# EAGLE board Dashboard Order r1 (EAGLE 7.1.0)
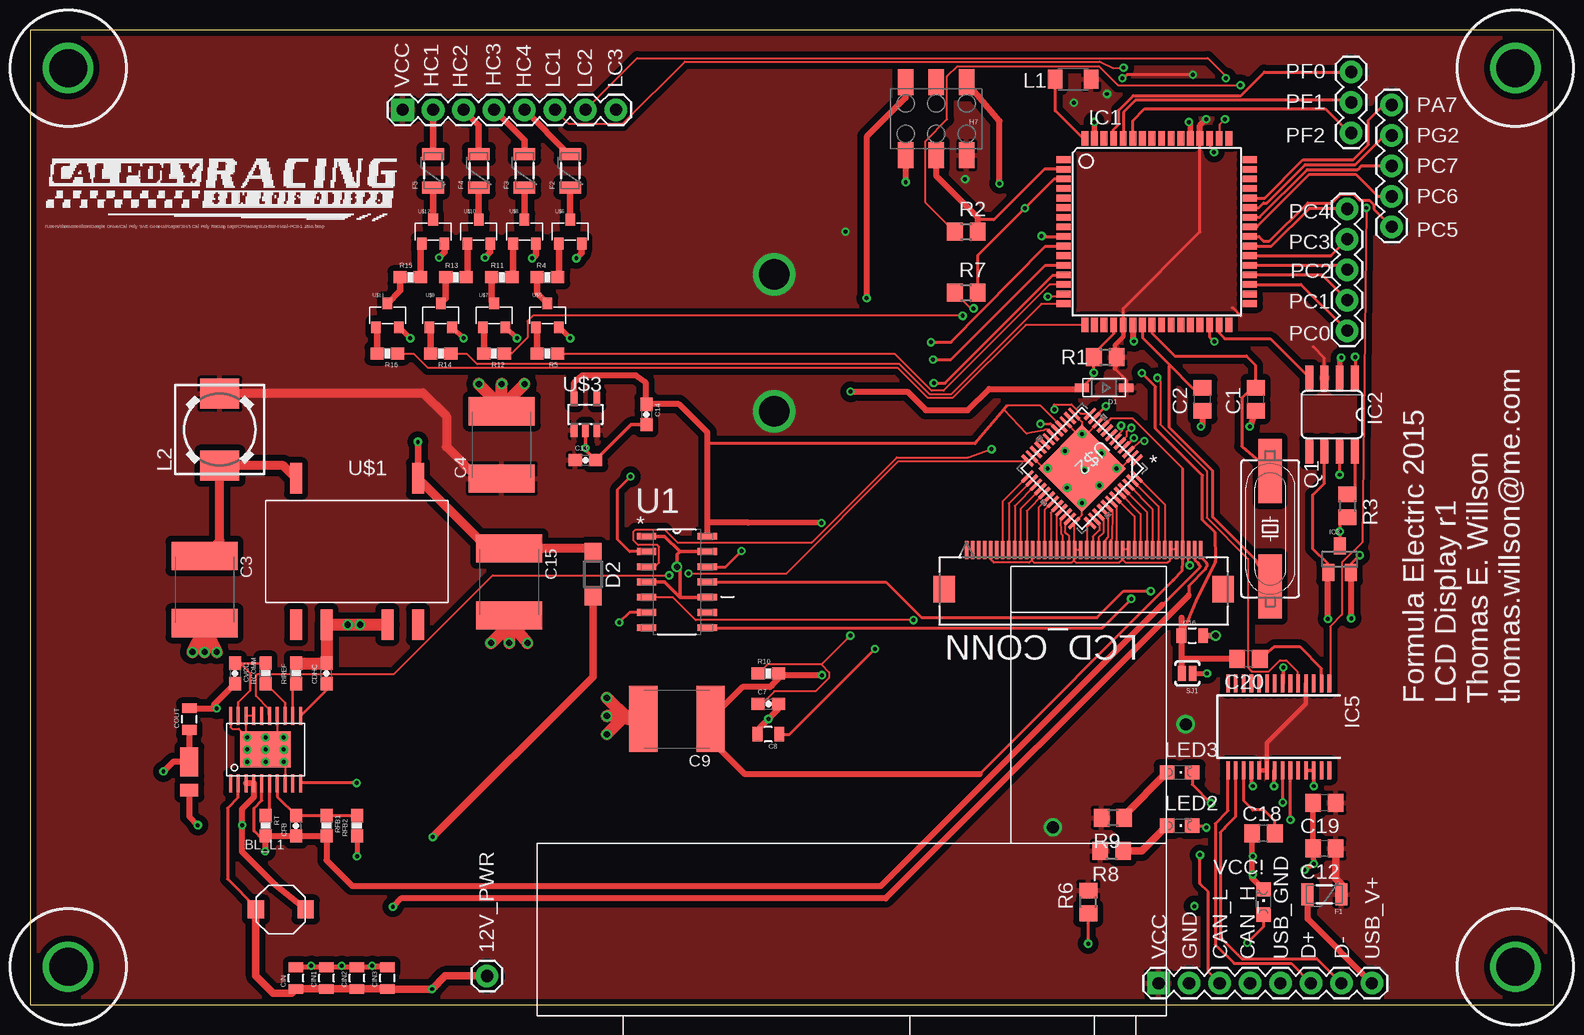
[diagram p0: board, top side]
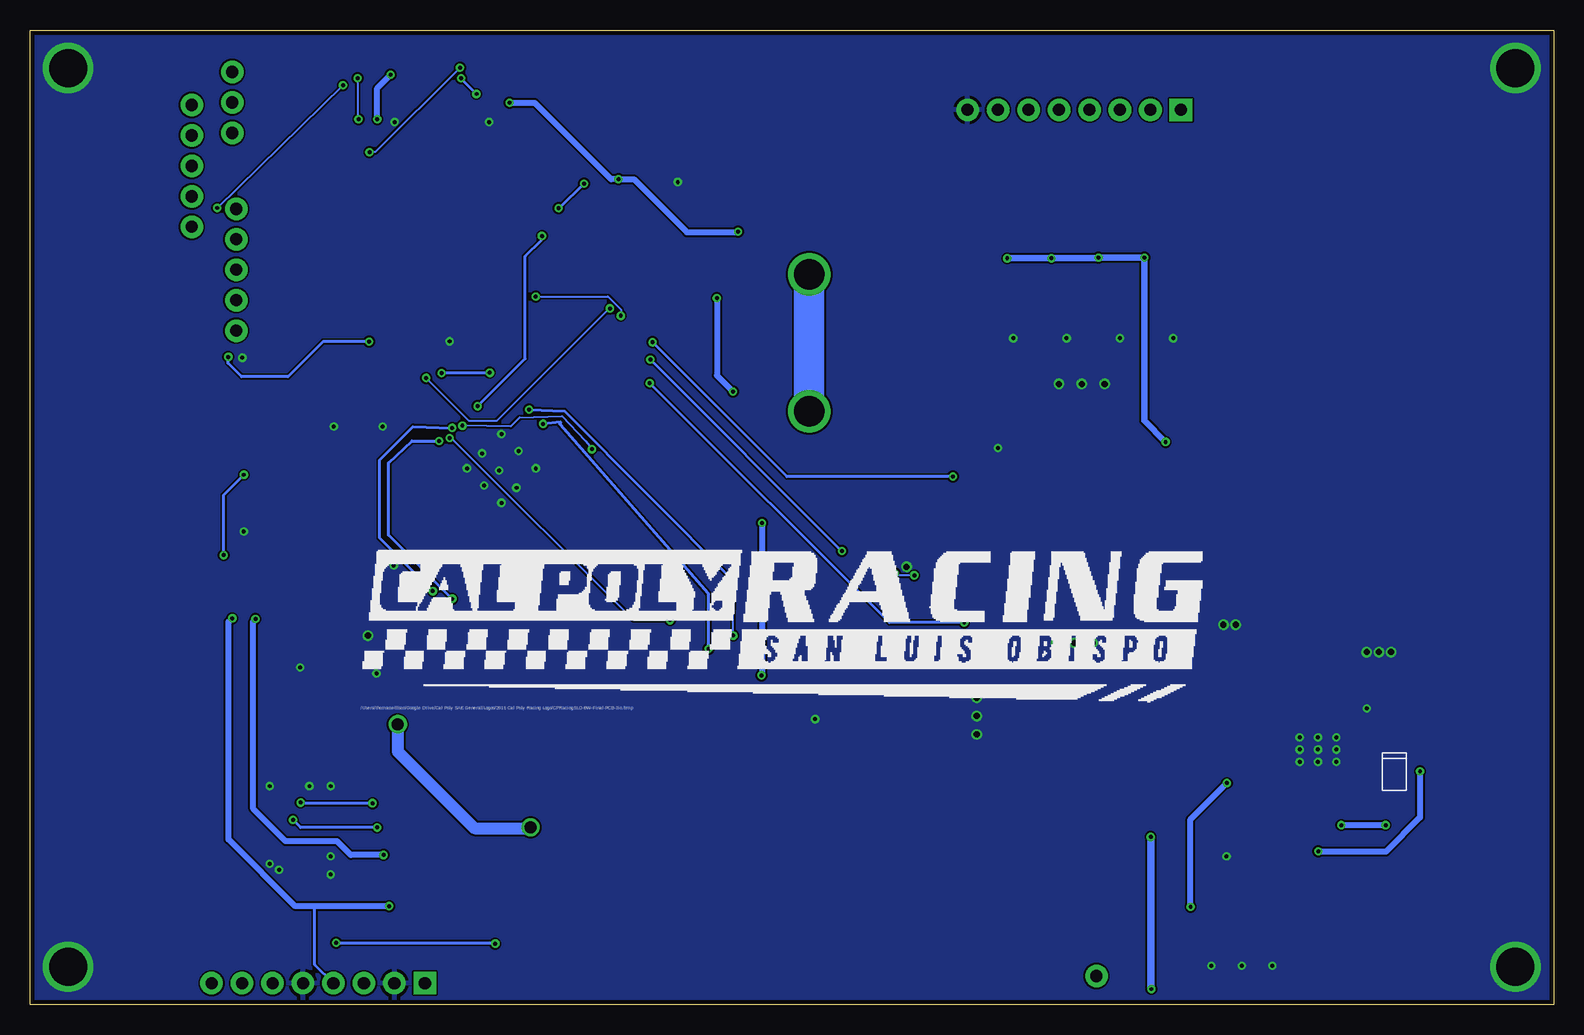
[diagram p1: board, bottom side, seen from below]

Size 127 x 81.28 mm. Coordinates in mm from the lower left corner, seen from the top.
Outline: 0,0 127,0 127,81.28 0,81.28 0,0
Copper layers (1*16): Top 0.0356mm / dielectric 1.5011mm / Bottom 0.0356mm
Design rules "LaenPCBOrder *": minimum track width 6mil, minimum drill 13mil, track to track 6mil, track to pad 6mil, pad to pad 6mil, via to via 6mil, smd to smd 6mil, copper to edge 15mil, drill to drill 6mil, minimum pad ring 7mil, minimum via ring 7mil, stop-mask expansion 3mil, vias tented up to drill 13mil, thermal gap 10mil

## Footprints (pad centres in the part's own frame; a part is rotated, then mirrored left to right if it is on the bottom)
1X01 = drill 1.016 pad 1.88: 1 0,0
POWERDI-123 = smd 1.05 x 1.5: A -0.85,0 | smd 2.4 x 1.5: C 1.525,0
2-SMD = smd 1.35 x 1.5: 1 -2.075,0; 2 2.075,0
C0805 = smd 1.3 x 1.5: 1 -0.95,0; 2 0.95,0
C2220 = smd 2.35 x 5.5: 1 -2.8,0; 2 2.8,0
0603-CAP = smd 1.1 x 1: 1 -0.85,0; 2 0.85,0
0805 = smd 0.8 x 1.2: 1 -0.9,0; 2 0.9,0
1X08 = drill 1.016 pad 1.88 square: 1 0,0 | drill 1.016 pad 1.88: 2 2.54,0; 3 5.08,0; 4 7.62,0; 5 10.16,0; 6 12.7,0; 7 15.24,0; 8 17.78,0
SOD-123 = smd 1.2 x 0.7: A 1.85,0; C -1.85,0
SOD123 = smd 1.4 x 1.4: A 1.9,0; C -1.9,0
1X05 = drill 1.016 pad 1.88: 1 0,0; 2 2.54,0; 3 5.08,0; 4 7.62,0; 5 10.16,0
1X03 = drill 1.016 pad 1.88: 1 0,0; 2 2.54,0; 3 5.08,0
PTC-1206 = smd 1 x 1.8: 1 -1.4,0; 2 1.4,0
2X3_SMD_FCI_54202-G30 = smd 1.27 x 2.18: 1 -2.54,-3.05; 2 -2.54,3.05; 3 0,-3.05; 4 0,3.05; 5 2.54,-3.05; 6 2.54,3.05
TQFP64 = smd 1.194 x 0.559: 1 -7.76,6; 2 -7.76,5.2; 3 -7.76,4.4; 4 -7.76,3.6; 5 -7.76,2.8; 6 -7.76,2; 7 -7.76,1.2; 8 -7.76,0.4; 9 -7.76,-0.4; 10 -7.76,-1.2; 11 -7.76,-2; 12 -7.76,-2.8; 13 -7.76,-3.6; 14 -7.76,-4.4; 15 -7.76,-5.2; 16 -7.76,-6; 33 7.76,-6; 34 7.76,-5.2; 35 7.76,-4.4; 36 7.76,-3.6; 37 7.76,-2.8; 38 7.76,-2; 39 7.76,-1.2; 40 7.76,-0.4; 41 7.76,0.4; 42 7.76,1.2; 43 7.76,2; 44 7.76,2.8; 45 7.76,3.6; 46 7.76,4.4; 47 7.76,5.2; 48 7.76,6 | smd 0.559 x 1.194: 17 -6,-7.76; 18 -5.2,-7.76; 19 -4.4,-7.76; 20 -3.6,-7.76; 21 -2.8,-7.76; 22 -2,-7.76; 23 -1.2,-7.76; 24 -0.4,-7.76; 25 0.4,-7.76; 26 1.2,-7.76; 27 2,-7.76; 28 2.8,-7.76; 29 3.6,-7.76; 30 4.4,-7.76; 31 5.2,-7.76; 32 6,-7.76; 49 6,7.76; 50 5.2,7.76; 51 4.4,7.76; 52 3.6,7.76; 53 2.8,7.76; 54 2,7.76; 55 1.2,7.76; 56 0.4,7.76; 57 -0.4,7.76; 58 -1.2,7.76; 59 -2,7.76; 60 -2.8,7.76; 61 -3.6,7.76; 62 -4.4,7.76; 63 -5.2,7.76; 64 -6,7.76
SO08 = smd 0.66 x 2.032: 1 -1.905,-3.073; 2 -0.635,-3.073; 3 0.635,-3.073; 4 1.905,-3.073; 5 1.905,3.073; 6 0.635,3.073; 7 -0.635,3.073; 8 -1.905,3.073
SOT-23 = smd 1 x 1.4: 1 -0.95,-1.1; 2 0.95,-1.1; 3 0,1.1
SSOP28 = smd 0.381 x 1.499: 1 -4.225,-3.625; 2 -3.575,-3.625; 3 -2.925,-3.625; 4 -2.275,-3.625; 5 -1.625,-3.625; 6 -0.975,-3.625; 7 -0.325,-3.625; 8 0.325,-3.625; 9 0.975,-3.625; 10 1.625,-3.625; 11 2.275,-3.625; 12 2.925,-3.625; 13 3.575,-3.625; 14 4.225,-3.625; 15 4.225,3.625; 16 3.575,3.625; 17 2.925,3.625; 18 2.275,3.625; 19 1.625,3.625; 20 0.975,3.625; 21 0.325,3.625; 22 -0.325,3.625; 23 -0.975,3.625; 24 -1.625,3.625; 25 -2.275,3.625; 26 -2.925,3.625; 27 -3.575,3.625; 28 -4.225,3.625
L3216C = smd 1.2 x 1.6: 1 -1.5,0; 2 1.5,0
DR73 = smd 2.5 x 3.25: 1 -3,0; 2 3,0
HIROSE_FH12A-40S-0.5SH(55) = smd 1.803 x 2.21: 41 -11.633,6.68; 42 11.633,6.68 | smd 0.305 x 1.499: P1 -9.754,3.429; P2 -9.246,3.429; P3 -8.738,3.429; P4 -8.255,3.429; P5 -7.747,3.429; P6 -7.239,3.429; P7 -6.756,3.429; P8 -6.248,3.429; P9 -5.74,3.429; P10 -5.258,3.429; P11 -4.75,3.429; P12 -4.242,3.429; P13 -3.759,3.429; P14 -3.251,3.429; P15 -2.743,3.429; P16 -2.261,3.429; P17 -1.753,3.429; P18 -1.245,3.429; P19 -0.762,3.429; P20 -0.254,3.429; P21 0.254,3.429; P22 0.762,3.429; P23 1.245,3.429; P24 1.753,3.429; P25 2.261,3.429; P26 2.743,3.429; P27 3.251,3.429; P28 3.759,3.429; P29 4.242,3.429; P30 4.75,3.429; P31 5.258,3.429; P32 5.74,3.429; P33 6.248,3.429; P34 6.756,3.429; P35 7.239,3.429; P36 7.747,3.429; P37 8.255,3.429; P38 8.738,3.429; P39 9.246,3.429; P40 9.754,3.429
CHIPLED_0805 = smd 1.2 x 1.2: A 0,-1.05; C 0,1.05
HC49UP = smd 5.334 x 1.93: 1 -4.826,0; 2 4.826,0
R0805 = smd 1.3 x 1.5: 1 -0.95,0; 2 0.95,0
0603-RES = smd 1.1 x 1: 1 -0.85,0; 2 0.85,0
SJ_2S-NO = smd 0.635 x 1.27: 1 -0.45,0; 2 0.45,0
SOIC127P600X175-14N = smd 1.6 x 0.559: 1 -2.54,3.81; 2 -2.54,2.54; 3 -2.54,1.27; 4 -2.54,0; 5 -2.54,-1.27; 6 -2.54,-2.54; 7 -2.54,-3.81; 8 2.54,-3.81; 9 2.54,-2.54; 10 2.54,-1.27; 11 2.54,0; 12 2.54,1.27; 13 2.54,2.54; 14 2.54,3.81
V78XX-1000 = smd 1 x 2.54: 1 -5.08,-6.096; 5 5.08,-6.096; 6 5.08,6.096; 7 2.54,6.096; 9 -2.54,6.096; 10 -5.08,6.096
RGZ48_5P15X5P15 = smd 1.245 x 0.279: 1 -3.683,2.743; 2 -3.683,2.261; 3 -3.683,1.753; 4 -3.683,1.245; 5 -3.683,0.762; 6 -3.683,0.254; 7 -3.683,-0.254; 8 -3.683,-0.762; 9 -3.683,-1.245; 10 -3.683,-1.753; 11 -3.683,-2.261; 12 -3.683,-2.743; 25 3.683,-2.743; 26 3.683,-2.261; 27 3.683,-1.753; 28 3.683,-1.245; 29 3.683,-0.762; 30 3.683,-0.254; 31 3.683,0.254; 32 3.683,0.762; 33 3.683,1.245; 34 3.683,1.753; 35 3.683,2.261; 36 3.683,2.743 | smd 0.279 x 1.245: 13 -2.743,-3.683; 14 -2.261,-3.683; 15 -1.753,-3.683; 16 -1.245,-3.683; 17 -0.762,-3.683; 18 -0.254,-3.683; 19 0.254,-3.683; 20 0.762,-3.683; 21 1.245,-3.683; 22 1.753,-3.683; 23 2.261,-3.683; 24 2.743,-3.683; 37 2.743,3.683; 38 2.261,3.683; 39 1.753,3.683; 40 1.245,3.683; 41 0.762,3.683; 42 0.254,3.683; 43 -0.254,3.683; 44 -0.762,3.683; 45 -1.245,3.683; 46 -1.753,3.683; 47 -2.261,3.683; 48 -2.743,3.683 | smd 5.156 x 5.156: EP 0,0 | drill 0.33: V_1 -2.032,2.032; V_2 0,2.032; V_3 2.032,2.032; V_4 -2.032,0.254; V_5 0,0.254; V_6 2.032,0.254; V_7 -2.032,-2.032; V_8 0,-2.032; V_9 2.032,-2.032
SOT23-DBV = smd 0.55 x 1.2: 1 -0.95,-1.3; 2 0,-1.3; 3 0.95,-1.3; 4 0.95,1.3; 5 -0.95,1.3
PWP0020A = smd 0.25 x 1.5: 1 -2.925,-2.8; 2 -2.275,-2.8; 3 -1.625,-2.8; 4 -0.975,-2.8; 5 -0.325,-2.8; 6 0.325,-2.8; 7 0.975,-2.8; 8 1.625,-2.8; 9 2.275,-2.8; 10 2.925,-2.8; 11 2.925,2.8; 12 2.275,2.8; 13 1.625,2.8; 14 0.975,2.8; 15 0.325,2.8; 16 -0.325,2.8; 17 -0.975,2.8; 18 -1.625,2.8; 19 -2.275,2.8; 20 -2.925,2.8 | smd 4.2 x 3: EP 0,0 | drill 0.33: P$1 -1.524,1.016; P$2 0,1.016; P$3 1.524,1.016; P$4 -1.524,0; P$5 0,0; P$6 1.524,0; P$7 1.524,-1.016; P$8 0,-1.016; P$9 -1.524,-1.016
SOT-23-3 = smd 0.8 x 0.976: P$1 0,1; P$2 -0.95,-1; P$3 0.95,-1

## Placement (x,y rotation side)
12V_PWR  M01PTH  [1X01]  38.1,2.41 0 top
BL_D1  DFLS1100-7  [POWERDI-123]  13.28,18.75 90 top
BL_L1  47uH  [2-SMD]  20.9,7.95 0 top
C1  18pF  [C0805]  102.18,50.5 90 top
C2  18pF  [C0805]  97.74,50.5 90 top
C3  22uF  [C2220]  14.55,34.62 270 top
C4  22uF  [C2220]  39.32,46.69 90 top
C7  100nF  [0603-CAP]  61.54,25.1 0 top
C8  4.7uF  [0805]  61.54,22.56 180 top
C9  10uF  [C2220]  53.92,23.83 180 top
C12  100n  [C0805]  107.9,13.03 180 top
C13  1uF  [0603-CAP]  46.3,45.42 0 top
C14  1uF  [0603-CAP]  51.38,49.23 270 top
C15  10uF  [C2220]  39.95,35.26 270 top
C16  4.7nF  [0805]  96.88,30.78 0 top
C18  100n  [C0805]  102.82,14.3 180 top
C19  100n  [C0805]  107.9,16.84 180 top
C20  100n  [C0805]  101.57,28.85 180 top
CAN_UC_CONN  [1X08]  94.08,1.8 0 top
CDHC  390nF  [0603-CAP]  24.71,27.64 90 top
CFB  10.0pF  [0603-CAP]  22.17,14.94 90 top
CIN  4.7uF  [0805]  22.17,2.24 90 top
CIN1  4.7uF  [0805]  24.71,2.24 90 top
CIN2  4.7uF  [0805]  27.25,2.24 90 top
CIN3  4.7uF  [0805]  29.79,2.24 90 top
COUT  120nF  [0805]  13.28,23.83 90 top
CVCC  1uF  [0603-CAP]  17.09,27.64 270 top
D1  1N4148  [SOD-123]  89.53,51.46 180 top
D2  1N5819  [SOD123]  46.94,35.89 270 top
DRIVER_INPUTS_1  [1X05]  109.8,56.21 90 top
DRIVER_INPUTS_2  [1X03]  110.13,77.77 270 top
DRIVER_INPUTS_3  [1X05]  113.51,75.03 270 top
DRIVER_OUTPUTS  [1X08]  31.06,74.63 0 top
F1  16V,0.25A  [PTC-1206]  107.9,9.22 180 top
F2  15V,0.5A  [PTC-1206]  45.03,69.55 90 top
F3  15V,0.5A  [PTC-1206]  41.22,69.55 90 top
F4  15V,0.5A  [PTC-1206]  37.41,69.55 90 top
F5  15V,0.5A  [PTC-1206]  33.6,69.55 90 top
H7  ICSP  [2X3_SMD_FCI_54202-G30]  75.54,73.89 180 top
IC1  AT90CAN128  [TQFP64]  93.93,64.47 0 top
IC2  MCP2551SO8  [SO08]  108.53,49.23 180 top
IC3  NUP2105L  [SOT-23]  109.17,37.16 0 top
IC5  FT232RL  [SSOP28]  104.09,23.19 180 top
L1  CS321613-100K  [L3216C]  86.94,77.17 180 top
L2  22uH  [DR73]  15.82,47.96 90 top
LCD_CONN  FH12A-40S-0.5SH(55)  [HIROSE_FH12A-40S-0.5SH(55)]  87.83,41.35 180 top
LED2  RX  [CHIPLED_0805]  95.83,14.94 270 top
LED3  TX  [CHIPLED_0805]  95.83,19.38 270 top
Q1  56P2859  [HC49UP]  103.38,39.7 270 top
R1  100K  [R0805]  89.64,54 0 top
R2  1k  [R0805]  78.05,64.47 0 top
R3  100K  [R0805]  109.8,41.61 270 top
R4  [0603-RES]  43.13,60.66 0 top
R5  [0603-RES]  43.13,54.31 180 top
R6  1K  [R0805]  88.21,8.59 90 top
R7  1k  [R0805]  78.05,59.39 0 top
R8  1k  [R0805]  90.17,12.83 180 top
R9  1k  [R0805]  90.27,15.6 180 top
R10  47k  [0603-RES]  61.54,27.64 0 top
R11  [0603-RES]  39.32,60.66 0 top
R12  [0603-RES]  38.68,54.31 180 top
R13  [0603-RES]  35.51,60.66 0 top
R14  [0603-RES]  34.24,54.31 180 top
R15  [0603-RES]  31.7,60.66 0 top
R16  [0603-RES]  29.79,54.31 180 top
RCOMM  52.3k  [0603-RES]  19.63,27.64 90 top
RFB1  309k  [0603-RES]  24.71,14.94 270 top
RFB2  16.2k  [0603-RES]  27.25,14.94 90 top
RIREF  20.5k  [0603-RES]  22.17,27.64 90 top
RT  226k  [0603-RES]  19.63,14.94 270 top
SJ1  SOLDERJUMPERNO  [SJ_2S-NO]  96.47,27.64 180 top
U1  74LCX125M  [SOIC127P600X175-14N]  53.92,35.26 0 top
U$1  V7805-1000  [V78XX-1000]  27.25,37.8 180 top
U$2  FT801  [RGZ48_5P15X5P15]  87.71,44.73 225 top
U$3  LP5907-3.3  [SOT23-DBV]  46.3,49.23 0 top
U$4  LM3492HC  [PWP0020A]  19.63,21.29 0 top
U$5  MMBT4401-7-F  [SOT-23-3]  43.13,57.48 0 top
U$6  MMBT4403-7-F  [SOT-23-3]  45.03,64.47 0 top
U$7  MMBT4401-7-F  [SOT-23-3]  38.68,57.48 0 top
U$8  MMBT4403-7-F  [SOT-23-3]  41.22,64.47 0 top
U$9  MMBT4401-7-F  [SOT-23-3]  34.24,57.48 0 top
U$10  MMBT4403-7-F  [SOT-23-3]  37.41,64.47 0 top
U$11  MMBT4401-7-F  [SOT-23-3]  29.79,57.48 0 top
U$12  MMBT4403-7-F  [SOT-23-3]  33.6,64.47 0 top
U$13  TCG043WQLBAANN-GN00  [TCG043WQLBAANN]  71.32,6.3 0 top
VCC!  PWR  [CHIPLED_0805]  102.82,8.59 0 top

## Library data of the parts
12V_PWR CAN_UC_CONN DRIVER_INPUTS_1-DRIVER_INPUTS_3 DRIVER_OUTPUTS H7 = SparkFun-Connectors
BL_D1 = diodes-inc
BL_L1 = tdk
C1 C2 C12 C18-C20 L1 R1-R3 R6-R9 = rcl
C3 C4 C9 C15 = resistor
C7 C8 C13 C14 C16 CDHC CIN CIN1-CIN3 CVCC = SparkFun-Capacitors
CFB COUT RFB1 RFB2 RIREF RT SJ1 = SparkFun-Passives
D1 = adafruit
D2 = diode
F1-F5 = SparkFun
IC1 = at90can128
IC2 = can
IC3 = Artificial Science
IC5 = SmartPrj
L2 = inductors
LCD_CONN = hirose; MPN: FH12A-40S-0.5SH(55); OC_FARNELL: 1324569; OC_NEWARK: 34M6194; PACKAGE: SOCKET FFC/FPC, ZIF, 0.5MM, 40WAY; SUPPLIER: Hirose
LED2 LED3 VCC! = led
Q1 = SparkFun-FreqCtrl
R4 R5 R10-R16 RCOMM = SparkFun-Resistors
U1 = Fairchild_By_element14_Batch_1; MPN: 74LCX125M; OC_FARNELL: 1013776; OC_NEWARK: 78K6286; PACKAGE: SOIC-14; SUPPLIER: Fairchild
U$1 U$5-U$12 = formula electric
U$2 = ftdichip
U$3 U$4 = texas
U$13 = kyocera

## Nets
3.3V: C9.1 C14.1 LCD_CONN.P4 R10.2 U1.14 U$2.9 U$2.16 U$2.18 U$3.5
12V: 12V_PWR.1 BL_L1.1 CIN1.1 CIN2.1 CIN3.1 CIN.1 D2.A U$4.2
12V_PROTECTED: C15.1 D2.C U$1.1 U$6.P$3 U$8.P$3 U$10.P$3 U$12.P$3
AREF: IC1.62
AVR_CS: IC1.10 U1.2
AVR_MISO: IC1.13 U1.6
AVR_MOSI: IC1.12 U1.12
AVR_SCK: IC1.11
AVR_SCLK: U1.9
B2: LCD_CONN.P23 U$2.35
B3: LCD_CONN.P24 U$2.34
B4: LCD_CONN.P25 U$2.33
B5: LCD_CONN.P26 U$2.32
B6: LCD_CONN.P27 U$2.31
B7: LCD_CONN.P28 U$2.30
BACKLIGHT_CTRL: U$2.24 U$4.15
BL_ANODE: BL_D1.C CFB.1 COUT.1 LCD_CONN.P2 RFB1.2 RT.2 U$4.5
BL_CATHODE: LCD_CONN.P1 U$4.10
CAN_H: CAN_UC_CONN.4 IC2.7 IC3.2
CAN_L: CAN_UC_CONN.3 IC2.6 IC3.1
D+: CAN_UC_CONN.6 IC5.15
D-: CAN_UC_CONN.7 IC5.16
DATA_EN: LCD_CONN.P34 U$2.25
DCLK: LCD_CONN.P30 U$2.29
DISP_EN: LCD_CONN.P31 U$2.28
DRV1: DRIVER_OUTPUTS.2 F5.2
DRV2: DRIVER_OUTPUTS.3 F4.2
DRV3: DRIVER_OUTPUTS.4 F3.2
DRV4: DRIVER_OUTPUTS.5 F2.2
DTR: C20.1 IC5.2
FT801_CS_N: U1.3 U$2.6
FT801_MISO: U1.5 U$2.4
FT801_MOSI: U1.11 U$2.5
FT801_SCLK: U1.8 U$2.3
G2: LCD_CONN.P15 U$2.42
G3: LCD_CONN.P16 U$2.41
G4: LCD_CONN.P17 U$2.40
G5: LCD_CONN.P18 U$2.39
G6: LCD_CONN.P19 U$2.38
G7: LCD_CONN.P20 U$2.37
GND: C1.1 C2.1 C3.2 C4.2 C7.2 C8.2 C9.2 C12.2 C13.2 C14.2 C15.2 C16.2 C18.2 C19.2 CAN_UC_CONN.2 CAN_UC_CONN.5 CDHC.2 CIN1.2 CIN2.2 CIN3.2 CIN.2 COUT.2 CVCC.2 DRIVER_OUTPUTS.8 H7.6 IC1.22 IC1.53 IC1.63 IC2.2 IC3.3 IC5.7 IC5.18 IC5.21 IC5.25 IC5.26 LCD_CONN.P3 LCD_CONN.P5 LCD_CONN.P6 LCD_CONN.P13 LCD_CONN.P14 LCD_CONN.P21 LCD_CONN.P22 LCD_CONN.P29 LCD_CONN.P36 R3.2 RFB2.1 RIREF.2 SJ1.1 U1.1 U1.4 U1.10 U1.13 U$1.7 U$1.9 U$2.2 U$2.10 U$2.13 U$2.15 U$2.23 U$2.36 U$2.EP U$2.V_1 U$2.V_2 U$2.V_3 U$2.V_4 U$2.V_5 U$2.V_6 U$2.V_7 U$2.V_8 U$2.V_9 U$3.2 U$4.8 U$4.14 U$4.17 U$4.18 U$4.20 U$4.EP U$4.P$1 U$4.P$2 U$4.P$3 U$4.P$4 U$4.P$5 U$4.P$6 U$4.P$7 U$4.P$8 U$4.P$9 U$5.P$3 U$7.P$3 U$9.P$3 U$11.P$3 VCC!.C
HSYNC: LCD_CONN.P32 U$2.27
INT_N: IC1.9 U$2.11
M8RXD: IC5.1 R2.1
M8TXD: IC5.5 R7.1
N$1 [gnd]: U1.7
N$2: C8.1 U$2.17
N$3: C7.1 R10.1 U$2.12
N$4: CVCC.1 RCOMM.2 U$4.19
N$5: RCOMM.1 U$4.13
N$6: IC2.8 R3.1
N$7: CDHC.1 U$4.11
N$8: BL_D1.A BL_L1.2 U$4.3 U$4.4
N$9: R6.1 VCC!.A
N$10: CFB.2 RFB1.1 RFB2.2 U$4.7
N$11: C1.2 IC1.24 Q1.1
N$12: RT.1 U$4.6
N$13: C3.1 L2.1 U$1.5
N$14: RIREF.1 U$4.12
N$22: IC1.64 L1.2
N$23: R5.2 U$5.P$2
N$24: R4.2 U$6.P$2
N$25: R4.1 U$5.P$1
N$26: F2.1 U$6.P$1
N$27: R12.2 U$7.P$2
N$28: R11.2 U$8.P$2
N$29: R11.1 U$7.P$1
N$30: F3.1 U$8.P$1
N$31: R14.2 U$9.P$2
N$32: IC5.23 LED2.C
N$33: R13.2 U$10.P$2
N$34: IC5.22 LED3.C
N$35: LED2.A R8.1
N$36: LED3.A R9.1
N$37: R13.1 U$9.P$1
N$38: F4.1 U$10.P$1
N$39: R16.2 U$11.P$2
N$40: R15.2 U$12.P$2
N$41: R15.1 U$11.P$1
N$42: F5.1 U$12.P$1
PA0: DRIVER_OUTPUTS.6 IC1.51
PA1: DRIVER_OUTPUTS.7 IC1.50
PA2: IC1.49
PA3: IC1.48
PA4: IC1.47
PA5: IC1.46
PA6: IC1.45
PA7: DRIVER_INPUTS_3.1 IC1.44
PB4(PWM): IC1.14 R5.1
PB5(PWM): IC1.15 R12.1
PB6(PWM): IC1.16 R14.1
PB7(PWM): IC1.17 R16.1
PC0: DRIVER_INPUTS_1.1 IC1.35
PC1: DRIVER_INPUTS_1.2 IC1.36
PC2: DRIVER_INPUTS_1.3 IC1.37
PC3: DRIVER_INPUTS_1.4 IC1.38
PC4: DRIVER_INPUTS_1.5 IC1.39
PC5: DRIVER_INPUTS_3.5 IC1.40
PC6: DRIVER_INPUTS_3.4 IC1.41
PC7: DRIVER_INPUTS_3.3 IC1.42
PD4: IC1.29
PD7: IC1.32
PE2: IC1.4
PE3(PWM): IC1.5
PE4(PWM): IC1.6
PE5(PWM): IC1.7
PE6: IC1.8
PF0: DRIVER_INPUTS_2.1 IC1.61
PF1: DRIVER_INPUTS_2.2 IC1.60
PF2: DRIVER_INPUTS_2.3 IC1.59
PF3: IC1.58
PG0: IC1.33
PG1: IC1.34
PG2: DRIVER_INPUTS_3.2 IC1.43
R2: LCD_CONN.P7 U$2.48
R3: LCD_CONN.P8 U$2.47
R4: LCD_CONN.P9 U$2.46
R5: LCD_CONN.P10 U$2.45
R6: LCD_CONN.P11 U$2.44
R7: LCD_CONN.P12 U$2.43
RESET: C16.1 C20.2 D1.A H7.5 IC1.20 R1.1 SJ1.2
RX: H7.4 IC1.2 R2.2
RX1: IC1.27
RXCAN: IC1.31 IC2.4
SCK: H7.3
SCL: IC1.25
SDA: IC1.26
TCK: IC1.57
TDI: IC1.54
TDO: IC1.55
TMS: IC1.56
TX: H7.1 IC1.3 R7.2
TX1: IC1.28
TXCAN: IC1.30 IC2.1
USB_V_IN [usbvcc]: CAN_UC_CONN.8 F1.2
VCC: C4.1 C12.1 C13.1 C19.1 CAN_UC_CONN.1 D1.C DRIVER_OUTPUTS.1 F1.1 H7.2 IC1.21 IC1.52 IC2.3 IC5.4 IC5.19 IC5.20 L1.1 L2.2 R1.2 R6.2 R8.2 R9.2 U$3.1 U$3.3
VCC3O: C18.1 IC5.17
VSYNC: LCD_CONN.P33 U$2.26
XTAL1: C2.2 IC1.23 Q1.2

## Tracks (layer width: path | path; a pad name or v marks a point on that pad's centre or on a via)
3.3V  (via drill 0.33)
  Top 0.152: 96.09,44.7 91.92,48.87 90.09,48.87 | R10.2 62.59,27.36 62.76,27.51 | C9.1 56.87,23.62 56.95,23.55 57.1,23.37 | U$2.16 84.23,49.96 81.46,49.96 | U$2.18 84.84,47.95 84.63,47.98 84.48,47.9 83.07,47.62 81.18,49.63
  Top 0.254: 96.09,44.7 LCD_CONN.P4 96.01,36.17 95.29,35.37 | 90.09,48.87 U$2.9 | 79.17,19.25 95.29,35.37 | 95.29,35.37 95.43,35.51 | 81.46,49.96 81.18,49.63 78.79,46.79 56.46,46.79 | v65.99,40.18 66,40.2
  Top 0.381: 51.31,50.15 C14.1 51.4,50.09 | 62.43,27.67 R10.2 62.39,27.21 | 61.67,26.49 61.82,26.64 61.91,26.56
  Top 0.508: U$3.5 45.35,51.88 46.05,52.5 50.5,52.5 51.31,51.92 51.31,50.15 | U1.14 56.46,40.21 | 56.46,40.21 56.46,46.79 56.46,47.73 54.1,50.09 51.4,50.09 | 62.39,27.21 61.82,26.64 | 61.67,26.49 59.39,26.49 C9.1 | 66,40.2 59.87,40.21 56.46,40.21 | 57.1,23.37 57.1,21.72 59.56,19.25 79.17,19.25 | 62.76,27.51 65.99,27.51 v66.02,27.48
  Bottom 0.508: v65.99,40.18 65.99,27.48 66.02,27.46 v66.02,27.48
12V  (via drill 0.33)
  Top 0.254: U$4.2 17.35,18.47 17.35,17.29 16.46,16.4 16.46,10.49 18.83,8.12 BL_L1.1 | 29.81,1.32 CIN3.1
  Top 0.635: CIN3.1 CIN2.1 CIN1.1 CIN.1 21.8,0.96 20.27,0.96 18.83,2.4 BL_L1.1 | D2.A 46.94,27.36 v33.58,13.99 | 29.81,1.32 v33.53,1.32 34.62,2.41 12V_PWR.1
  Bottom 0.254: 33.58,1.37 v33.53,1.32
  Bottom 0.635: v33.58,13.99 33.58,1.37
12V_PROTECTED  (via drill 0.33)
  Top 0.559: U$12.P$3 34.55,62.75 v34.11,62.31 | U$10.P$3 38.36,62.75 v37.92,62.31 | U$8.P$3 42.17,62.56 v41.86,62.24 | U$6.P$3 45.98,62.69 v45.54,62.24 | v32.33,46.94 U$1.1
  Top 0.762: U$1.1 38.17,38.05 C15.1 46.67,38.05 D2.C
  Bottom 0.559: v45.54,62.24 v41.86,62.24 37.99,62.24 v37.92,62.31 v34.11,62.31 34.11,48.72 v32.33,46.94
AVR_CS  (via drill 0.33)
  Top 0.254: U1.2 49.99,37.8 48.97,38.81 48.97,42.95 v50.06,44.04 | v75.11,55.24 76.78,55.24 84.63,63.25 86.15,63.25 IC1.10
  Bottom 0.254: v50.06,44.04 63.91,44.04 v75.11,55.24
AVR_MISO  (via drill 0.33)
  Top 0.254: U1.6 49.96,32.72 v49.12,31.88 | v75.34,51.84 76.28,51.84 85.27,60.83 86.14,60.83 IC1.13
  Bottom 0.254: v49.12,31.88 55.37,31.88 v75.34,51.84
AVR_MOSI  (via drill 0.33)
  Top 0.254: U1.12 57.99,36.52 v59.31,37.85 | v75.29,53.8 76.76,53.8 84.63,61.67 IC1.12
  Bottom 0.254: v59.31,37.85 59.33,37.85 v75.29,53.8
B2
  Top 0.152: U$2.35 86.28,40.09 86.26,39.45 86.59,39.12 LCD_CONN.P23
B3
  Top 0.152: U$2.34 85.88,40.5 85.95,39.29 86.08,39.17 LCD_CONN.P24
B4
  Top 0.152: U$2.33 85.57,40.84 LCD_CONN.P25
B5
  Top 0.152: U$2.32 85.09,41.04 LCD_CONN.P26
B6
  Top 0.152: U$2.31 84.58,41.25 LCD_CONN.P27
B7
  Top 0.152: U$2.30 84.07,41.46 LCD_CONN.P28
BACKLIGHT_CTRL  (via drill 0.33)
  Top 0.152: v54.89,35.97 63.04,35.97 72.42,45.34 83.16,45.34 U$2.24 | v53.29,35.81 38.58,35.81 30.35,27.58 19,27.58 18.85,27.43 18.85,25.76 19.91,24.69 19.91,24.16 U$4.15
  Bottom 0.152: v54.89,35.97 54.74,35.81 v53.29,35.81
BL_ANODE  (via drill 0.33)
  Top 0.254: U$4.5 19.32,18.48 19.32,17.03 18.68,16.4 18.68,14.49 19.09,14.09 RT.2 19.63,14.07 19.61,14.05 19.61,14.1 RT.2 | 19.61,12.78 v19.61,12.8 | 94.36,33.35 94.39,33.35 97.56,36.52 97.36,36.85 97.21,37.01 97.08,37.19 LCD_CONN.P2
  Top 0.508: RT.2 CFB.1 RFB1.2 24.71,12.06 26.87,9.91 70.92,9.91 94.36,33.35 | 19.61,14.05 v19.61,12.8 | v11.12,19.46 11.94,20.27 BL_D1.C COUT.1
  Bottom 0.254: 19.58,12.78 v19.61,12.8
  Bottom 0.508: v11.12,19.46 11.12,15.62 13.97,12.78 19.58,12.78
BL_CATHODE  (via drill 0.33)
  Top 0.254: LCD_CONN.P1 97.59,37.34 98.04,36.88 arc-103 97.99,36.45 97.99,36.32 96.6,34.92 96.6,34.14 | v27.23,18.49 U$4.10
  Top 0.508: 96.6,34.14 71.32,8.87 30.94,8.87 v30.25,8.18
  Bottom 0.508: v30.25,8.18 30.25,15.47 v27.23,18.49
CAN_H  (via drill 0.33)
  Top 0.254: IC3.2 110.12,36.76 v110.85,37.49 | v109.17,44.2 IC2.7
  Top 0.508: v110.13,32.23 110.13,36.05 IC3.2
  Bottom 0.254: v110.85,37.49 110.85,42.52 v109.17,44.2 | CAN_UC_CONN.4 103.25,3.35 103.25,8.23
  Bottom 0.508: v97.05,8.23 103.25,8.23 104.88,8.23 110.44,13.79 110.44,31.93 v110.13,32.23
CAN_L  (via drill 0.33)
  Top 0.254: IC3.1 108.22,36.74 106.93,38.02 106.93,42.52 107.9,43.48 IC2.6 | CAN_UC_CONN.3 98.22,2.74 98.22,9.42 97.54,10.11 v97.54,12.5
  Top 0.508: v108.2,32.18 108.2,36.05 IC3.1
  Bottom 0.508: v97.54,12.5 100.25,12.5 101.4,13.64 105.69,13.64 108.38,16.33 108.38,32 v108.2,32.18
D+
  Top 0.254: IC5.15 99.87,19.56 99.87,16.18 98.81,15.11 98.81,5.03 100.38,3.45 105.13,3.45 CAN_UC_CONN.6
D-
  Top 0.254: IC5.16 100.51,15.7 99.64,14.83 99.57,14.73 99.21,14.38 99.21,5.66 99.31,5.56 99.42,5.49 101.04,3.86 107.26,3.86 CAN_UC_CONN.7
DATA_EN
  Top 0.152: U$2.25 81.08,41.98 LCD_CONN.P34
DCLK
  Top 0.152: U$2.29 83.08,41.18 LCD_CONN.P30
DISP_EN
  Top 0.152: U$2.28 82.58,41.36 LCD_CONN.P31
DRV1
  Top 0.559: DRIVER_OUTPUTS.2 F5.2
DRV2
  Top 0.559: DRIVER_OUTPUTS.3 37.41,73.36 F4.2
DRV3
  Top 0.559: DRIVER_OUTPUTS.4 41.22,72.08 F3.2
DRV4
  Top 0.559: DRIVER_OUTPUTS.5 44.9,70.94 F2.2
DTR
  Top 0.254: IC5.2 107.66,28.05 105.84,29.87 103.77,29.87 C20.1
FT801_CS_N  (via drill 0.33, 0.33 pad 0.41)
  Top 0.152: v90.96,48.28 91.01,47.85 90.55,47.4 90.55,47.17 U$2.6 | v80.16,46.33 78.21,45.64 72.26,45.64 65.18,38.56 53.97,38.56 52.91,39.62 50.47,39.62 50.32,39.47 50.32,38.71 50.7,38.33 52.3,38.33 52.45,38.18 52.45,36.88 52.15,36.58 U1.3
  Top 0.254: U1.3 52.05,36.52
  Bottom 0.152: v90.96,48.28 86.92,48.23 86.18,48.97 82.65,49.07 80.67,47.02 v80.16,46.33
FT801_MISO  (via drill 0.33)
  Top 0.152: U1.5 53.59,33.98 55.5,32.08 v73.64,32.08
  Top 0.254: U$2.4 92.02,47.24 v92.02,47.27
  Bottom 0.152: v73.64,32.08 76.68,32.08 91.92,47.32 v92.02,47.27
FT801_MOSI  (via drill 0.33)
  Top 0.152: v91.82,48.11 91.42,47.78 91.42,47.4 90.85,46.83 U$2.5
  Top 0.254: U1.11 71.35,35.26 74.32,32.28 88.95,32.28 91.16,34.49 v93.42,34.49 | 90.86,46.8 U$2.5
  Bottom 0.254: v93.42,34.49 97.87,38.94 97.87,45.41 95.07,48.21 v91.82,48.11
FT801_SCLK  (via drill 0.33)
  Top 0.152: 92.88,47.02 92.5,46.91 U$2.3
  Top 0.254: U1.8 89.38,31.45 v91.8,33.86 | v92.89,47.02 92.88,47.02
  Bottom 0.254: v91.8,33.86 97.1,39.17 97.1,45.19 95.15,47.02 v92.89,47.02
G2
  Top 0.152: U$2.42 90.58,41.5 LCD_CONN.P15
G3
  Top 0.152: U$2.41 90.25,41.16 90.2,38.86 90.09,38.76 LCD_CONN.P16
G4
  Top 0.152: U$2.40 89.87,40.81 89.87,38.99 89.59,38.71 LCD_CONN.P17
G5
  Top 0.152: U$2.39 89.48,40.5 89.48,39.34 89.08,38.96 LCD_CONN.P18
G6
  Top 0.152: U$2.38 89.15,40.11 89.15,39.57 88.59,39.04 LCD_CONN.P19
G7
  Top 0.152: U$2.37 88.09,39.9 LCD_CONN.P20
GND  (via drill 0.33, 0.51, 3.17)
  Top 0.152: U$4.P$7 21.26,20.17 U$4.8 | U$4.14 20.61,22.85 U$4.P$3 | U$4.17 U$4.18 18.01,22.4 U$4.P$1 17.4,23.01 16.84,23.01 16.71,23.14 U$4.20 | v15.57,24.71 v15.56,24.71 15.55,24.73 | LCD_CONN.P22 87.04,37.95 U$2.36 87.71,40.85 U$2.V_3 U$2.V_2 U$2.V_5 87.88,44.58 87.73,44.73 U$2.EP | U$2.V_1 90.9,44.73 U$2.2 | U$2.V_7 88.1,47.6 U$2.10 | U$2.V_7 87.31,47.6 U$2.15 | U$2.13 87.71,48.61 U$2.V_7 | U$2.V_9 84.51,44.73 U$2.23 | U$2.V_8 U$2.V_7 | LCD_CONN.P5 95.58,37.95 95.12,37.95 LCD_CONN.P6 95.05,37.87 95.05,37.11 94.82,36.88 91.31,36.88 91.05,37.15 | LCD_CONN.P13 91.54,37.95 91.08,37.95 LCD_CONN.P14 91.08,37.19 91.05,37.15 | LCD_CONN.P21 87.58,37.95 87.12,37.95 LCD_CONN.P22 | 83.5,37.07 83.54,37.11 83.54,37.87 LCD_CONN.P29 | 83.5,37.07 83.31,36.88 80.34,36.88 80.11,37.11 80.11,37.87 LCD_CONN.P36 | 87.01,37.07 86.82,36.88 83.69,36.88 83.5,37.07 | 87.01,37.07 87.05,37.11 87.05,37.87 LCD_CONN.P22 | LCD_CONN.P3 96.57,36.8 v96.67,36.65 | 91.05,37.15 90.78,36.88 87.2,36.88 87.01,37.07
  Top 0.254: R3.2 109.17,40.66 v109.17,39.47 IC3.3
  Top 0.305: C14.2 50.11,48.38 C13.2 46.3,46.27 v46.3,46.43 U$3.2 | U1.1 52.91,39.06 54.18,37.8 | 54.18,37.8 U1.13 | U1.4 52.91,35.26 54.18,33.98 | 54.18,33.98 U1.10 | 54.18,37.8 53.92,37.54 v53.92,36.52 54.18,36.27 54.18,33.98 | IC5.7 104.47,26.82 v104.47,28.14 | IC5.25 IC5.26 v107.01,18.24 | IC5.21 103.71,19.57 v103.71,18.24 | IC5.18 101.81,18.35 v101.93,18.24
  Top 0.406: U$11.P$3 30.79,56.48 v31.7,55.58 | U$9.P$3 35.24,56.48 v36.14,55.58 | U$7.P$3 39.68,56.48 v40.59,55.58 | U$5.P$3 44.13,56.48 v45.03,55.58 | RFB2.1 v27.25,12.39 | CIN.2 CIN1.2 CIN2.2 CIN3.2 29.68,3.25 v28.52,3.25 | SJ1.1 v98.12,27.64
  Top 0.457: C18.2 101.87,10.87 | 101.87,10.87 101.87,10.59 VCC!.C | C19.2 C12.2 107.01,11.82 v106.25,11.25 | v101.93,10.87 101.87,10.87 | IC1.63 v88.73,73.6 v88.72,73.61 | IC1.53 96.73,73.48 v96.6,73.61 | IC2.2 109.17,53.67 v109.3,53.95
  Top 0.508: COUT.2 15.32,24.73 | 15.32,24.73 15.55,24.73 | CVCC.2 15.32,25.01 15.32,24.73 | C8.2 60.64,22.93 v61.54,23.82 62.39,24.68 C7.2 | IC1.22 91.93,55.42 v92.02,55.32 | C2.1 97.74,48.34 v97.61,48.21 | C1.1 v101.68,48.21 | C16.2 v98.83,30.79 | H7.6 v73,68.61
  Top 1.016: 39.32,49.86 v39.32,51.77 | C4.2 39.32,49.86 | 39.32,49.86 v41.22,51.77 | 39.32,49.86 v37.41,51.77 | 39.95,31.7 v39.95,30.18 | C15.2 39.95,31.95 | 39.95,31.95 39.95,31.7 | 39.95,31.7 v38.43,30.18 | 39.95,31.95 v41.48,30.18 | U$1.9 v27.51,31.7 v26.49,31.7 U$1.7 CDHC.2 RIREF.2 | C3.2 14.55,30.94 | 14.55,30.94 v14.55,29.41 | 14.55,30.94 14.3,30.94 v13.54,29.41 | 14.81,30.94 v15.57,29.41 | 49.61,24.08 v48.08,24.08 | v48.08,25.6 49.86,23.82 C9.2 50.87,24.08 49.61,24.08 | 49.61,24.08 v48.08,22.55
  other vias: 23.44,3.25 25.98,3.25 101.93,12.4 107.01,11.76 3.17,78.11 3.17,3.17 123.83,78.11 123.83,3.17
  pour Bottom: -0.25,80.92 126.97,81.23 126.97,-0.05 -0.25,-0.36
HSYNC
  Top 0.152: U$2.27 82.09,41.59 LCD_CONN.P32
INT_N  (via drill 0.33)
  Top 0.254: U$2.11 v89.69,49.91 | v84.33,64.11 84.37,64.06 IC1.9
  Bottom 0.254: v89.69,49.91 85.73,53.87 85.73,62.41 84.33,63.8 v84.33,64.11
M8RXD  (via drill 0.33)
  Top 0.152: v111.4,66.45 111.05,38.56 109.37,36.88 109.37,32.54 108.38,31.55 108.38,26.82 IC5.1 | v100.91,76.68 90.7,76.66 89.1,78.26 77.29,78.26 76.45,77.42 76.45,73.84 74.62,72.01 74.62,66.9 77.06,64.47 R2.1
  Bottom 0.152: v100.91,76.68 v111.4,66.45
M8TXD  (via drill 0.33)
  Top 0.152: v93.98,52.27 94.21,52.05 94.21,48.39 98.09,44.5 98.09,40.62 101.52,37.19 101.52,28.12 101.83,27.81 103.28,27.81 104.19,28.73 104.72,28.73 105.64,27.81 105.64,26.82 IC5.5 | v78.66,58.06 78.44,58.06 77.14,59.36 R7.1
  Bottom 0.152: v93.98,52.27 90.4,48.69 88.11,48.69 78.74,58.06 v78.66,58.06
N$2  (via drill 0.33)
  Top 0.254: C8.1 63.32,22.55 v70.43,29.67 | v84.23,48.44 85.05,48.46 U$2.17
  Bottom 0.254: v70.43,29.67 70.43,34.24 82.83,48.39 82.75,48.59 v84.23,48.44
N$3  (via drill 0.33)
  Top 0.152: 65.98,28.38 65.94,28.42 61.52,28.42 60.76,27.66 R10.1 | 65.98,28.38 66.62,27.74 66.62,27.28 65.48,26.14 62.05,26.14 61.06,25.15 60.76,25.15 C7.1 | v85.39,49.63 85.37,50.06 86.82,50.06 87.58,49.3 88.34,49.3 U$2.12 | 65.98,28.38 v68.38,30.79
  Bottom 0.152: v68.38,30.79 68.38,33.07
  Bottom 0.254: v85.39,49.63 82.42,49.51 68.4,35.38 68.4,33.1 68.38,33.07
N$4
  Top 0.191: RCOMM.2 CVCC.1 17.51,28.48 18.36,27.64 18.36,26.21 17.37,25.22 17.37,24.1 U$4.19
N$5
  Top 0.191: RCOMM.1 21.26,25.16 U$4.13
N$6
  Top 0.254: IC2.8 110.44,43.19 R3.1
N$7
  Top 0.254: CDHC.1 24.71,26.24 U$4.11
N$8  (via drill 0.33)
  Top 0.254: 17.98,18.46 U$4.3 | 18.67,18.48 U$4.4
  Top 0.508: U$4.4 U$4.3 | BL_L1.2 20.44,10.02 17.68,12.78 v17.68,14.99 17.68,16.33 18.67,17.32 18.67,18.48 | BL_D1.A 13.28,15.7 v13.99,14.99
  Bottom 0.508: v13.99,14.99 v17.68,14.99
N$9  (via drill 0.33)
  Top 0.254: VCC!.A 102.82,6.53 v101.47,5.18 | v88.21,5.11 R6.1
  Bottom 0.254: v101.47,5.18 88.29,5.18 v88.21,5.11
N$10
  Top 0.254: U$4.7 20.61,17.35 CFB.2 RFB1.1 RFB2.2
N$11
  Top 0.254: IC1.24 93.53,56 95.43,54.1 101.4,54.1 102.16,53.34 102.16,51.47 C1.2 101.86,51.45 101.02,50.6 101.02,46.56 Q1.1
N$12
  Top 0.254: RT.1 19.96,16.11 U$4.6
N$13
  Top 0.762: C3.1 15.82,38.69 L2.1 21.11,44.95 U$1.5
N$14
  Top 0.191: RIREF.1 21.91,26.52 U$4.12
N$22
  Top 0.254: IC1.64 87.8,72.22 85.47,74.55 85.47,77.14 L1.2
N$23
  Top 0.559: U$5.P$2 42.28,56.38 R5.2
N$24
  Top 0.559: R4.2 44.08,60.76 U$6.P$2
N$25
  Top 0.559: U$5.P$1 42.28,59.33 R4.1
N$26
  Top 0.559: F2.1 U$6.P$1
N$27
  Top 0.559: U$7.P$2 37.83,56.38 R12.2
N$28
  Top 0.559: R11.2 40.27,60.76 U$8.P$2
N$29
  Top 0.559: U$7.P$1 38.47,58.7 R11.1
N$30
  Top 0.559: F3.1 U$8.P$1
N$31
  Top 0.559: U$9.P$2 33.39,56.38 R14.2
N$32  (via drill 0.33)
  Top 0.254: LED2.C 97.92,14.94 v98.07,14.78 | v105.08,15.42 105.08,19.55 IC5.23
  Bottom 0.254: v98.07,14.78 104.45,14.78 v105.08,15.42
N$33
  Top 0.559: R13.2 36.46,60.76 U$10.P$2
N$34  (via drill 0.33)
  Top 0.254: LED3.C 96.88,18.38 v98.45,16.82 | v104.45,16.87 104.45,19.54 IC5.22
  Bottom 0.254: v98.45,16.82 104.39,16.82 v104.45,16.87
N$35
  Top 0.635: R8.1 92.68,12.83 LED2.A
N$36
  Top 0.635: R9.1 91.22,15.82 LED3.A
N$37
  Top 0.559: U$9.P$1 34.66,58.9 R13.1
N$38
  Top 0.559: F4.1 U$10.P$1
N$39
  Top 0.559: U$11.P$2 28.94,56.38 R16.2
N$40
  Top 0.559: U$12.P$2 32.55,63.36 R15.2
N$41
  Top 0.559: U$11.P$1 30.85,59.53 R15.1
N$42
  Top 0.559: F5.1 U$12.P$1
PA0  (via drill 0.33)
  Top 0.152: v98.7,71.09 98.7,71.25 98.4,71.55 98.4,72.16 IC1.51 | v91.16,78.13 90.3,78.11 89.18,78.64 54.58,78.64 49.4,73.46 44.91,73.46 43.76,74.6 DRIVER_OUTPUTS.6
  Bottom 0.152: v98.7,71.09 98.25,71.09 v91.16,78.13
PA1  (via drill 0.33)
  Top 0.152: v99.62,73.84 99.16,73.38 99.16,72.24 IC1.50 | v99.7,77.27 99.7,77.42 98.17,78.94 50.62,78.94 DRIVER_OUTPUTS.7
  Bottom 0.152: v99.62,73.84 99.7,73.91 v99.7,77.27
PA7
  Top 0.254: IC1.44 102.93,67.27 106.12,70.46 110.31,70.46 111.58,71.73 111.58,73.76 112.85,75.03 DRIVER_INPUTS_3.1
PB4(PWM)
  Top 0.152: R5.1 43.99,54.25 72.11,54.25 75.16,51.21 76.15,51.21 84.99,60.05 86.13,60.05 IC1.14
PB5(PWM)  (via drill 0.33)
  Top 0.152: v77.75,57.45 41.94,57.45 41.48,57 41.48,55.63 40.18,54.33 39.57,54.33 R12.1 | v84.84,59.05 85.98,59.05 86.13,59.21 IC1.15
  Bottom 0.152: v77.75,57.45 77.75,57.99 78.82,59.05 v84.84,59.05
PB6(PWM)
  Top 0.152: R14.1 35.15,54.25 36.45,54.25 37.29,53.42 72.49,53.42 75.01,50.9 76.76,50.9 84.3,58.45 86.13,58.45 IC1.16
PB7(PWM)
  Top 0.152: R16.1 30.66,54.25 32.03,54.25 33.17,53.11 72.34,53.11 74.85,50.6 76.91,50.6 83.01,56.69 87.88,56.69 IC1.17
PC0
  Top 0.254: IC1.35 105.95,60.06 DRIVER_INPUTS_1.1
PC1
  Top 0.254: IC1.36 107.69,60.87 DRIVER_INPUTS_1.2
PC2
  Top 0.254: IC1.37 109.43,61.66 DRIVER_INPUTS_1.3
PC3
  Top 0.254: IC1.38 108.44,62.47 DRIVER_INPUTS_1.4
PC4
  Top 0.254: IC1.39 103.5,63.27 106.68,66.45 109.73,66.45 DRIVER_INPUTS_1.5
PC5
  Top 0.254: DRIVER_INPUTS_3.5 112.04,66.34 112.04,66.7 111.66,67.08 110.82,67.08 110.31,67.59 109.27,67.59 108.53,66.85 106.5,66.85 103.33,63.68 102.82,63.68 102.44,64.06 101.7,64.06 IC1.40
PC6
  Top 0.254: DRIVER_INPUTS_3.4 112.34,67.41 110.52,69.24 106.66,69.24 102.29,64.87 101.7,64.87 IC1.41
PC7
  Top 0.254: DRIVER_INPUTS_3.3 110.97,69.95 110.67,69.65 106.48,69.65 102.49,65.66 101.7,65.66 IC1.42
PF0
  Top 0.254: DRIVER_INPUTS_2.1 102.89,77.78 100.94,75.82 91.97,75.82 90.75,74.6 90.75,73.41 90.32,72.97 90.32,72.24 IC1.61
PF1
  Top 0.254: IC1.60 91.16,72.26 91.16,74.42 92.15,75.41 109.96,75.41 DRIVER_INPUTS_2.2
PF2
  Top 0.254: IC1.59 91.93,73.72 92.91,74.7 107.98,74.7 110.47,72.21 110.47,72.36 DRIVER_INPUTS_2.3
PG2
  Top 0.254: DRIVER_INPUTS_3.2 112.93,72.49 110.49,70.05 106.3,70.05 103.1,66.85 102.82,66.85 102.44,66.47 101.7,66.47 IC1.43
R2
  Top 0.152: U$2.48 94.59,41.73 LCD_CONN.P7
R3
  Top 0.152: U$2.47 94.08,41.55 LCD_CONN.P8
R4
  Top 0.152: U$2.46 93.57,41.34 LCD_CONN.P9
R5
  Top 0.152: U$2.45 93.09,41.1 LCD_CONN.P10
R6
  Top 0.152: U$2.44 92.58,40.93 LCD_CONN.P11
R7
  Top 0.152: U$2.43 92.08,40.72 LCD_CONN.P12
RESET  (via drill 0.33)
  Top 0.152: v88.67,52.7 88.65,52.73 88.69,52.73
  Top 0.254: R1.1 88.53,54.14 90.37,55.98 90.37,56.66 IC1.20 | 96.02,32.28 C16.1 97.2,33.7 98.81,36.98 98.76,39.42 97.74,40.44 97.74,44.15 93.83,48.06 93.83,51.54 v92.69,52.68 | 88.69,53.53 R1.1 | D1.A 88.69,52.46 88.69,52.73 R1.1
  Top 0.508: SJ1.2 96.02,28.85 | 96.02,28.85 96.02,32.28 | C20.2 96.02,28.85 | H7.5 73,75.62 69.75,72.36 v69.75,58.93 | v68.4,51.13 73.13,51.13 74.68,49.58 78.18,49.58 79.96,51.36 87.58,51.36 D1.A
  Bottom 0.254: v88.67,52.7 88.7,52.68 v92.69,52.68
  Bottom 0.508: v69.75,58.93 69.75,52.48 v68.4,51.13
RX
  Top 0.254: IC1.2 84.55,69.67 80.34,65.46 78.99,65.46
  Top 0.508: H7.4 75.54,69.11 78.99,65.66 78.99,65.46 R2.2
RXCAN
  Top 0.254: IC1.31 99.13,56.01 99.59,55.55 103.38,55.55 IC2.4
TX  (via drill 0.33)
  Top 0.254: R7.2 79,62.49 v82.93,66.42 85.38,68.86 IC1.3
  Top 0.508: v80.82,68.48 80.82,73.69 H7.1
  Bottom 0.254: v80.82,68.48 82.88,66.42 v82.93,66.42
TXCAN  (via drill 0.33)
  Top 0.254: IC1.30 98.33,55.7 v98.73,55.3 | v110.47,54.03 110.47,52.32 IC2.1
  Bottom 0.254: v98.73,55.3 102.56,55.3 105.49,52.38 109.37,52.38 110.49,53.49 110.49,54 v110.47,54.03
USB_V_IN
  Top 0.508: F1.2 106.5,7.31 106.5,7.16 CAN_UC_CONN.8
VCC  (via drill 0.33, 1.02, 2.54)
  Top 0.254: IC1.21 91.13,58.06 97.54,64.47 IC1.52 | 100.2,58.12 100.25,58.12 100.94,57.43 | 90.42,53.05 91.39,52.08 D1.C | v96.93,77.55 91.44,77.55 v91.06,77.27 | IC2.3 107.9,53.92 106.96,54.86
  Top 0.381: IC5.4 106.36,25.11 103.11,21.86 IC5.20 IC5.19 | IC1.21 91.13,55.72 90.42,55.02 90.42,53.05 R1.2
  Top 0.508: IC1.52 97.53,73.32 v98.04,73.84 | v67.97,64.47 67.94,64.47 67.92,64.49 | F1.1 109.3,10.04
  Top 0.635: 109.3,10.04 108.85,10.49 C12.1
  Top 0.762: L2.2 15.9,51.03 32.77,51.03 34.72,49.07 34.72,46.53 37.37,43.88 C4.1
  Bottom 0.254: v91.06,77.27 91.03,77.19 v89.79,75.95
  Bottom 0.508: v98.04,73.84 98.04,76.43 v96.93,77.55 | v87.02,75.21 87,75.18 84.91,75.18 78.56,68.83 v77.95,68.83 76.66,68.83 72.24,64.41 67.97,64.41 67.92,64.47 v67.97,64.47
  Bottom 1.016: v96.34,23.39 96.34,21.13 89.94,14.73 85.34,14.73 v85.27,14.81
  Bottom 2.54: v62.05,60.91 v62.05,49.48
  pour Top (isolate 0.508): -0.03,81.33 126.85,81.56 126.85,0.28 -0.03,0.05
VCC3O
  Top 0.254: C18.1 103.77,15.36 102.87,16.26 101.93,16.26 101.17,17.02 IC5.17
VSYNC
  Top 0.152: U$2.26 81.59,41.8 LCD_CONN.P33
XTAL1
  Top 0.254: IC1.23 92.73,55.63 95.02,53.34 | 95.02,53.34 96.92,51.45 C2.2 | Q1.2 102.18,37.08 98.6,40.66 98.6,44.53 95,48.13 95,53.31 95.02,53.34

## Text on the board
tNames: HC1 | HC3 | PF0 | VCC | HC2 | HC4 | LC1 | LC2 | LC3 | PF1 | PA7 | PF2 | PG2 | PC7 | PC6 | PC4 | /Users/thomaswillson/Google Drive/Cal Poly SAE General/Logos/2015 Cal Poly Racing Logo/CPRacingSLO-BW-Final-PCB-1.25in.bmp | PC5 | PC3 | PC2 | PC1 | PC0 | Formula Electric 2015 / LCD Display r1 / Thomas E. Willson / thomas.willson@me.com | VCC | GND | CAN_L | CAN_H | USB_GND | D+ | D- | USB_V+
bNames: /Users/thomaswillson/Google Drive/Cal Poly SAE General/Logos/2015 Cal Poly Racing Logo/CPRacingSLO-BW-Final-PCB-3in.bmp